# Altium PCB Carrier_Board.PcbDoc
Units mm, origin at the board's own origin, x right, y up, seen from the top; angles counter-clockwise.
Board outline 91.82 x 102.87 mm, 2 copper layers (Top Layer, Bottom Layer); 11 components, 0 nets, 129 pads, 7 vias.
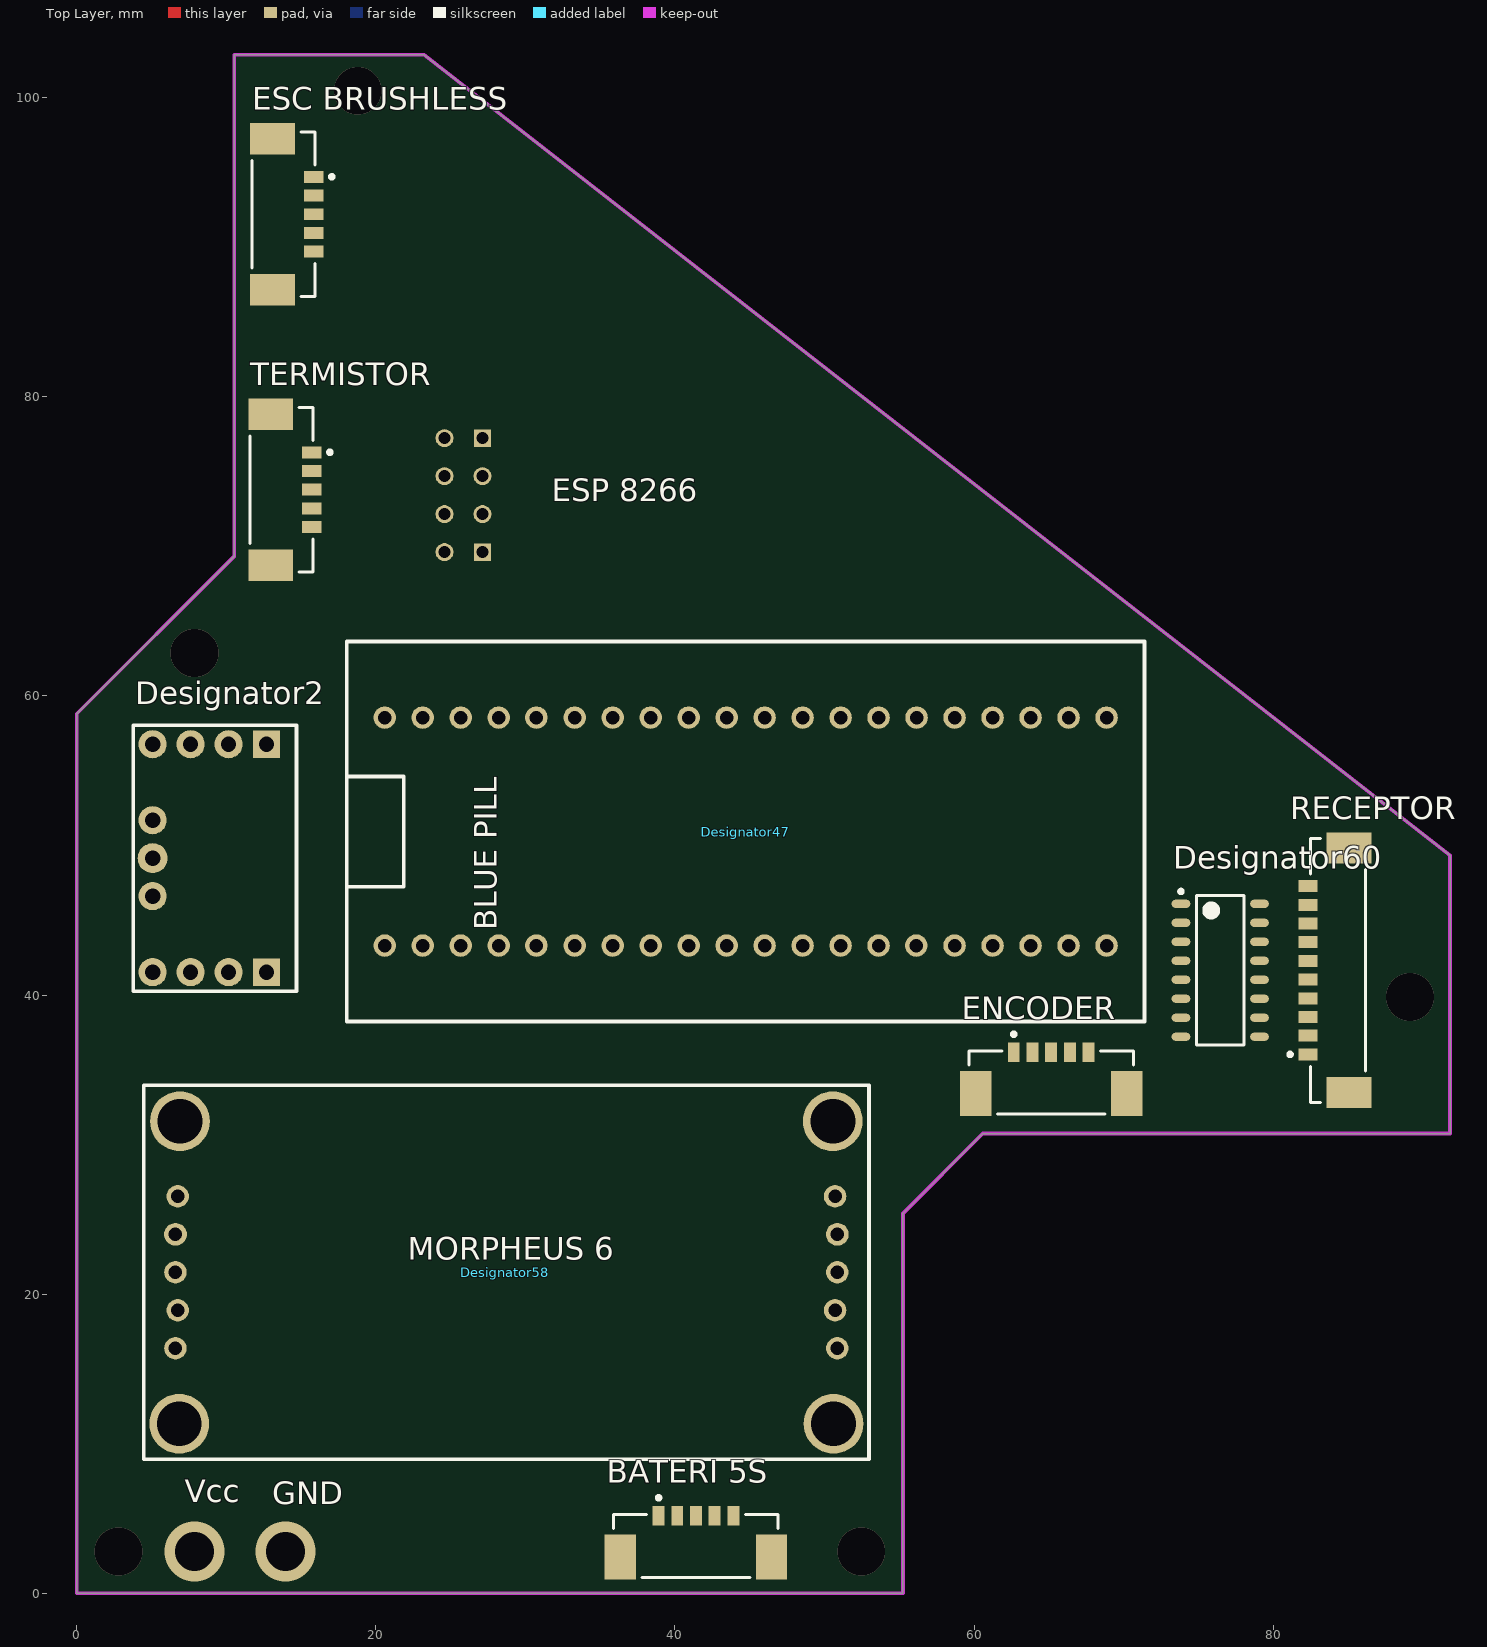
[diagram p0: Top Layer view]
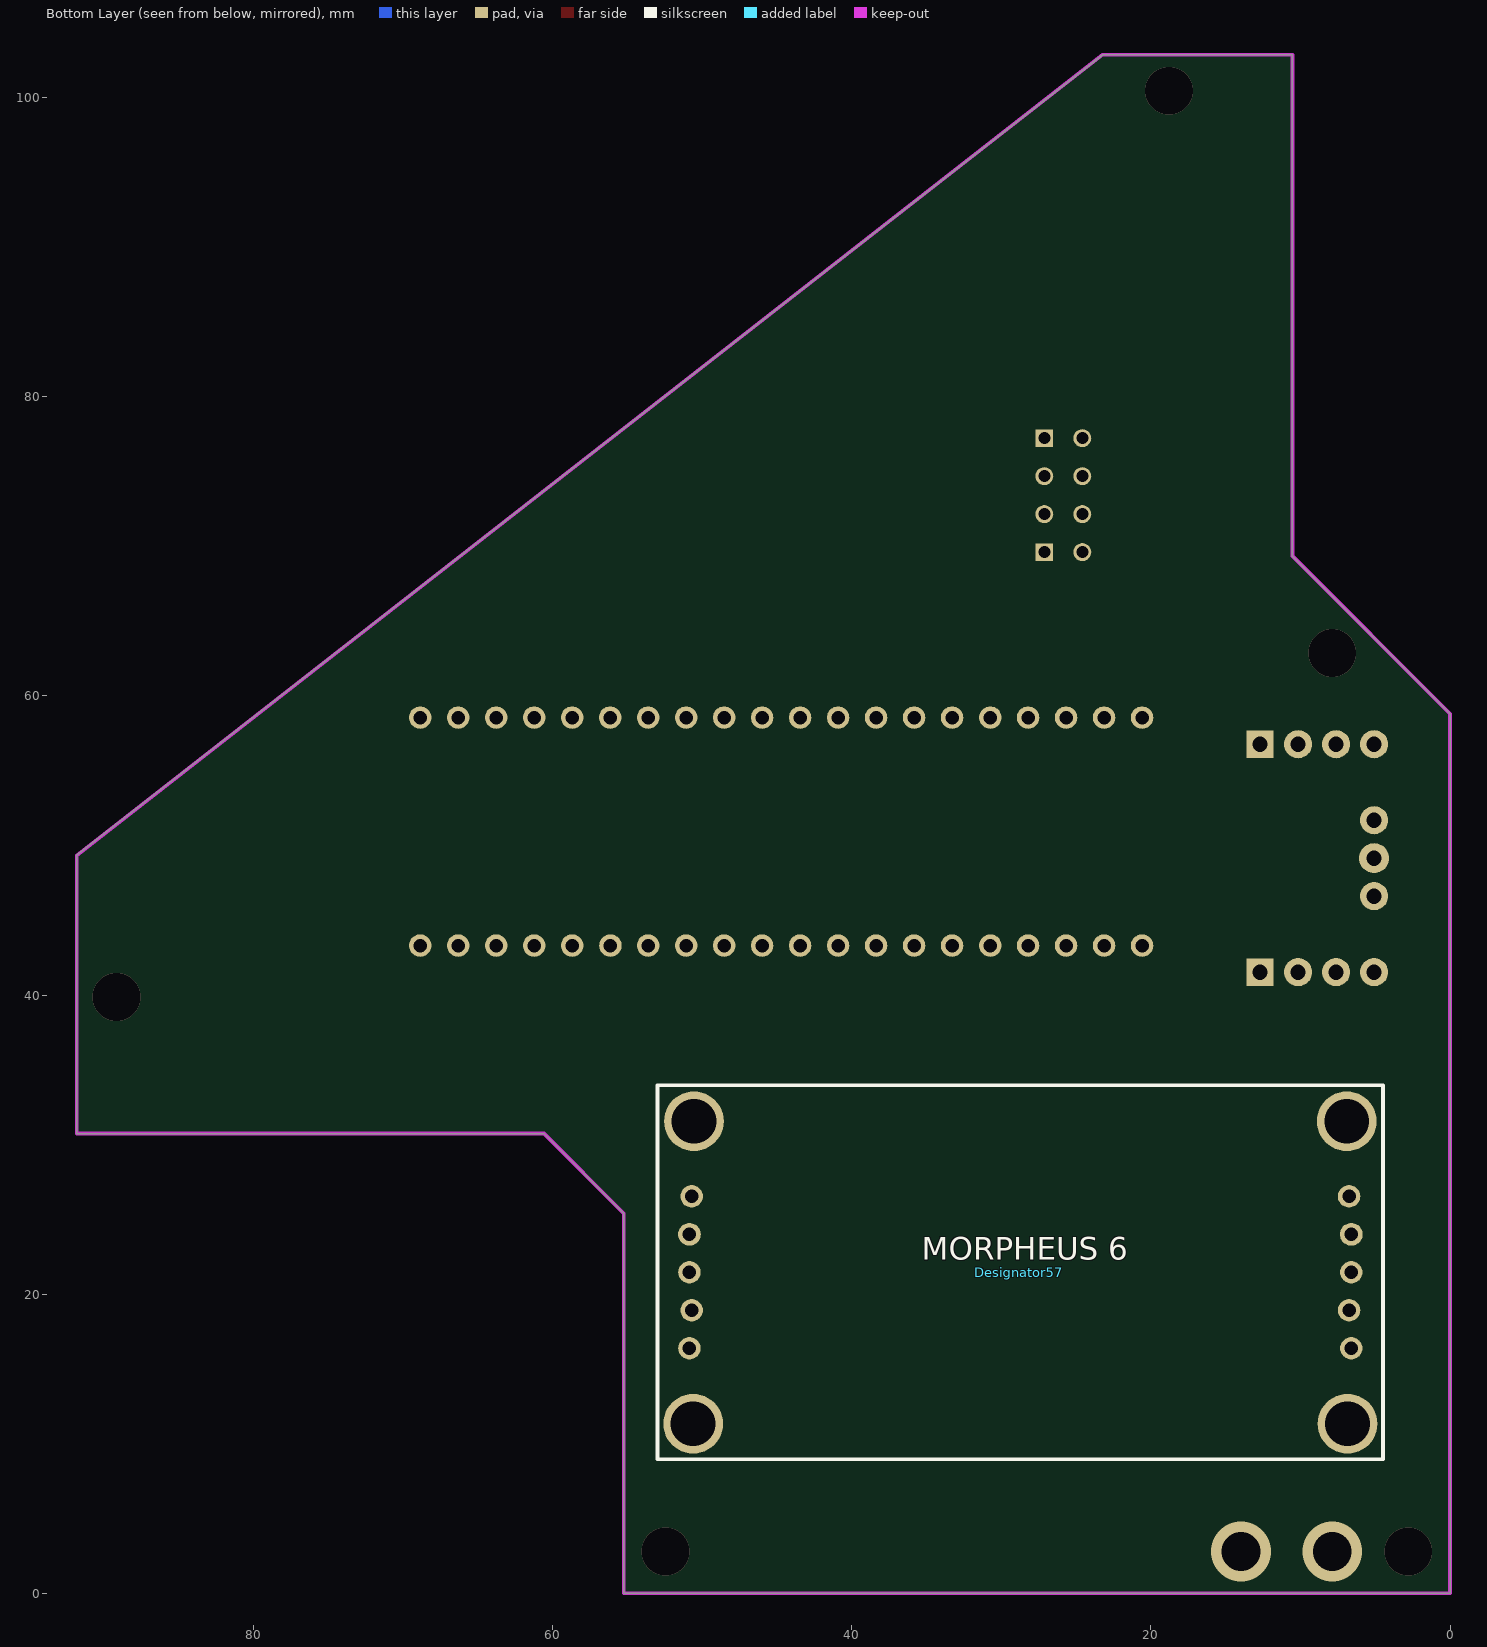
[diagram p1: Bottom Layer view, seen from below]

## Layer stack, top to bottom
Top Solder: solder mask 0.0102, Solder Resist, Dk 3.5
Top Layer: signal copper 0.0356
Dielectric 1: dielectric 0.32, FR-4, Dk 4.8
Bottom Layer: signal copper 0.0356
Bottom Solder: solder mask 0.0102, Solder Resist, Dk 3.5

## Board outline
0,0 0,58.801 10.541,69.342 10.541,102.87 23.219,102.87 91.821,49.342 91.821,30.734 60.579,30.734 55.245,25.4 55.245,0

## Design rules (kind name [scope] priority, off if disabled: settings)
Clearance [All] p1: gap=0.254 ignorepadtopadclearanceinfootprint=FALSE except(0: Arc-Hole Track-Hole SMDPad-Hole THPad-Hole Via-Hole Fill-Hole Poly-Hole Region-Hole Text-Hole)
PolygonConnect [All] p1: connectstyle=Relief reliefconductorwidth=0.254 reliefentries=4 polygonreliefangle="90 Angle" airgapwidth=0.254
RoutingVias [All] p1: holewidth=0.711 width=1.27 viastyle="Through Hole" minholewidth=0.711 minwidth=1.27 maxholewidth=0.711 maxwidth=1.27
SolderMaskExpansion [All] p1: expansion=0.102
Width [All] p1: maxlimit=0.254 minlimit=0.254 preferedwidth=0.254
30 further rules are at their usual default settings.

## Components (designator, comment, footprint, x,y, rotation, side; value= is the part's Value field where it differs from the comment)
"BATERI 5S" "Comment" MOLX-53398-0571-5_V 41.402,3.81 r0 top
Designator2 "Comment" MPU-9250_CONECTOR 14.707,58.039 r180 top
Designator47 "Comment" "blue pill" 68.854,50.927 r90 top
Designator57 "Comment" MORPHEUS6_CN 52.979,8.963 r180 bottom
Designator58 "Comment" MORPHEUS6_CN 4.479,8.963 r0 top
Designator60 "Comment" D0016A_L 76.454,41.656 r0 top
ENCODER "Comment" MOLX-53398-0571-5_V 65.151,34.798 r0 top
"ESC BRUSHLESS" "Comment" MOLX-53398-0571-5_V 14.478,92.202 r270 top
"ESP 8266" "Comment" ESP01 32.766,73.406 r270 top
RECEPTOR "Comment" MOLX-53398-1071_V 84.074,41.656 r270 top
TERMISTOR "Comment" MOLX-53398-0571-5_V 14.351,73.787 r270 top

## Footprints (in the part's own frame and the unit in brackets; to place one, negate y for a bottom-side part, rotate by r counter-clockwise, add the part's x,y. Pads: shape width x height; smd on the part's side, far side on the other; paste and mask are expansions set on the pad)
"blue pill" [mm]
  round 1.5 hole 0.9: 1(-7.62,0) 1(7.62,0) 2(-7.62,2.54) 2(7.62,2.54) 3(-7.62,5.08) 3(7.62,5.08) 4(-7.62,7.62) 4(7.62,7.62) 5(-7.62,10.16) 5(7.62,10.16) 6(-7.62,12.72) 6(7.62,12.7) 7(-7.62,15.24) 7(7.62,15.24) 8(-7.62,17.78) 8(7.62,17.78) 9(-7.62,20.32) 9(7.62,20.32) 10(-7.62,22.86) 10(7.62,22.86) 11(-7.62,25.4) 11(7.62,25.4) 12(-7.62,27.94) 12(7.62,27.94) 13(-7.62,30.48) 13(7.62,30.48) 14(-7.62,33.02) 14(7.62,33.02) 15(-7.62,35.56) 15(7.62,35.56) 16(-7.62,38.12) 16(7.62,38.12) 17(-7.62,40.64) 17(7.62,40.64) 18(-7.62,43.18) 18(7.62,43.18) 19(-7.62,45.72) 19(7.62,45.72) 20(-7.62,48.26) 20(7.62,48.26)
  silkscreen extent -12.7,-2.54 12.7,50.8
D0016A_L [mm] "SOIC, 16-Leads, Body 10x4mm, Pitch 1.27mm, IPC High Density"
  oval 1.25x0.55 smd: 1(-2.625,4.445) 2(-2.625,3.175) 3(-2.625,1.905) 4(-2.625,0.635) 5(-2.625,-0.635) 6(-2.625,-1.905) 7(-2.625,-3.175) 8(-2.625,-4.445) 9(2.625,-4.445) 10(2.625,-3.175) 11(2.625,-1.905) 12(2.625,-0.635) 13(2.625,0.635) 14(2.625,1.905) 15(2.625,3.175) 16(2.625,4.445)
  silkscreen extent -2.75,-5 1.6,5.39, body extent -3,-4.95 3,4.95, height 1.59
ESP01 [mm]
  round 1.2 / inner round 1.524 / far side round 1.2 hole 0.8: CH_PD(-1.285,-8.178) GPIO0(1.255,-5.638) GPIO2(-1.285,-5.638) RST(1.255,-8.178) TX(-3.825,-8.178) VCC(3.795,-8.178)
  rect 1.162x1.162 / inner rect 1.524x1.524 / far side rect 1.162x1.162 hole 0.8: GND(-3.825,-5.638) RX(3.795,-5.638)
  body extent -7.25,-9.71 7.25,15.29, height 3.48
MOLX-53398-0571-5_V [mm] "CONN, 5-Leads, Body 11x4.2mm, Pitch 1.25mm"
  rect 0.8x1.3 smd: 1(-2.5,1.375) 2(-1.25,1.375) 3(0,1.375) 4(1.25,1.375) 5(2.5,1.375)
  rect 2.1x3 smd: MP1(-5.05,-1.375) MP2(5.05,-1.375)
  silkscreen extent -5.5,-2.75 5.5,2.7, body extent -5.7,-2.75 5.7,1.45, height 4.7
MOLX-53398-1071_V [mm] "SMD, 10-Leads, Body 17.65x3.7mm, Pitch 1.25mm"
  rect 0.8x1.3 smd: 1(5.625,-1.75) 2(4.375,-1.75) 3(3.125,-1.75) 4(1.875,-1.75) 5(0.625,-1.75) 6(-0.625,-1.75) 7(-1.875,-1.75) 8(-3.125,-1.75) 9(-4.375,-1.75) 10(-5.625,-1.75)
  rect 2.1x3 smd: MP1(8.175,1) MP2(-8.175,1)
  silkscreen extent -8.82,-3.07 8.82,2.1, body extent -8.82,-2.1 8.83,2.1, height 4.77
MORPHEUS6_CN [mm] "BARRAMENTO DE PINO MORPHEUS 6"
  round 1.5 hole 0.9: 1(2.125,7.42) 2(46.225,9.96) 3(2.125,12.5) 5(46.225,17.58)
  round 1.524 hole 0.9: 4(2.125,15.04)
  round 4 hole 3: "BAT 5S"(46.125,2.375) GND(2.425,22.6)
  silkscreen extent 0,0 48.5,25, body extent 0.01,-0.05 48.51,24.95, height 17
MPU-9250_CONECTOR [mil]
  rect 71.65x71.65 / inner rect 60x60 / far side rect 71.65x71.65 hole 40: 1(79,650) 1(79,50)
  round 74 / inner round 60 / far side round 74 hole 40: 1(379,450) 2(179,650) 2(179,50) 3(279,650) 3(279,50) 3(379,250) 4(379,650) 4(379,50)
  round 79 hole 40: 2(379,350)
  silkscreen extent 0,0 430,700, body extent 0,0 430,700, height 197

## Via types
v1: diameter 3.2, hole 3.2, Top Layer to Bottom Layer, 5 vias
v2: diameter 4, hole 2.6, Top Layer to Bottom Layer, 2 vias

## Nets (pads, with @x,y where several pads share a name; then routed paths per layer and width w, separated by ;. In a path a pad name is that pad's centre, name@x,y a point inside that pad or via, vN(x,y) a via of type N, cw(c..) or ccw(c..) an arc to the next point about the centre after c; other vN are vias at no path point)
pads on no net: "BATERI 5S.1" "BATERI 5S.2" "BATERI 5S.3" "BATERI 5S.4" "BATERI 5S.5" "BATERI 5S.MP1" "BATERI 5S.MP2" "Designator57.BAT 5S" "Designator58.BAT 5S" "ESC BRUSHLESS.1" "ESC BRUSHLESS.2" "ESC BRUSHLESS.3" "ESC BRUSHLESS.4" "ESC BRUSHLESS.5" "ESC BRUSHLESS.MP1" "ESC BRUSHLESS.MP2" "ESP 8266.CH_PD" "ESP 8266.GND" "ESP 8266.GPIO0" "ESP 8266.GPIO2" "ESP 8266.RST" "ESP 8266.RX" "ESP 8266.TX" "ESP 8266.VCC" Designator2.1 Designator2.2 Designator2.3 Designator2.4 Designator47.1 Designator47.2 Designator47.3 Designator47.4 Designator47.5 Designator47.6 Designator47.7 Designator47.8 Designator47.9 Designator47.10 Designator47.11 Designator47.12 Designator47.13 Designator47.14 Designator47.15 Designator47.16 Designator47.17 Designator47.18 Designator47.19 Designator47.20 Designator57.1 Designator57.2 Designator57.3 Designator57.4 Designator57.5 Designator57.GND Designator58.1 Designator58.2 Designator58.3 Designator58.4 Designator58.5 Designator58.GND Designator60.1 Designator60.2 Designator60.3 Designator60.4 Designator60.5 Designator60.6 Designator60.7 Designator60.8 Designator60.9 Designator60.10 Designator60.11 Designator60.12 Designator60.13 Designator60.14 Designator60.15 Designator60.16 ENCODER.1 ENCODER.2 ENCODER.3 ENCODER.4 ENCODER.5 ENCODER.MP1 ENCODER.MP2 RECEPTOR.1 RECEPTOR.2 RECEPTOR.3 RECEPTOR.4 RECEPTOR.5 RECEPTOR.6 RECEPTOR.7 RECEPTOR.8 RECEPTOR.9 RECEPTOR.10 RECEPTOR.MP1 RECEPTOR.MP2 TERMISTOR.1 TERMISTOR.2 TERMISTOR.3 TERMISTOR.4 TERMISTOR.5 TERMISTOR.MP1 TERMISTOR.MP2
copper on no net:
  other v1: 2.794,2.794 52.451,2.794 89.154,39.878 7.874,62.865 18.796,100.457
  other v2: 7.874,2.794 13.97,2.794

## Keep-outs
Keep-Out Layer:
  lines w0.254: 0,58.801 10.541,69.342 ; 0,58.801 0,0 55.245,0 55.245,25.4 60.579,30.734 63.373,30.734 73.787,30.734 91.821,30.734 91.821,49.342 23.219,102.87 10.541,102.87 10.541,69.342 ; 0,58.801 0,58.801 ; 10.541,69.342 10.541,69.342

## Silkscreen, mask and mechanical layers (free items; w line width, h text height)
Top Overlay:
  text "Vcc" at 7.239,6.096 h1.52
  text "GND" at 13.081,5.969 h1.52

## Text inside footprints (layer, text, board x,y; h text height)
Designator47: Top Overlay "BLUE PILL" at 28.087,44.323 h1.52 r90
Designator57: Bottom Overlay "MORPHEUS 6" at 35.326,22.298 h1.52
Designator58: Top Overlay "MORPHEUS 6" at 22.132,22.298 h1.52